# Altium PCB DB_Panel.PcbDoc
Units mm, origin at the board's own origin, x right, y up, seen from the top; angles counter-clockwise.
Board outline 241.45 x 205.99 mm, 4 copper layers (Top, Ground Plane, Power Plane, Bottom), stack 1.562 mm thick; 32 components, 0 nets, 4 pads, 0 vias.
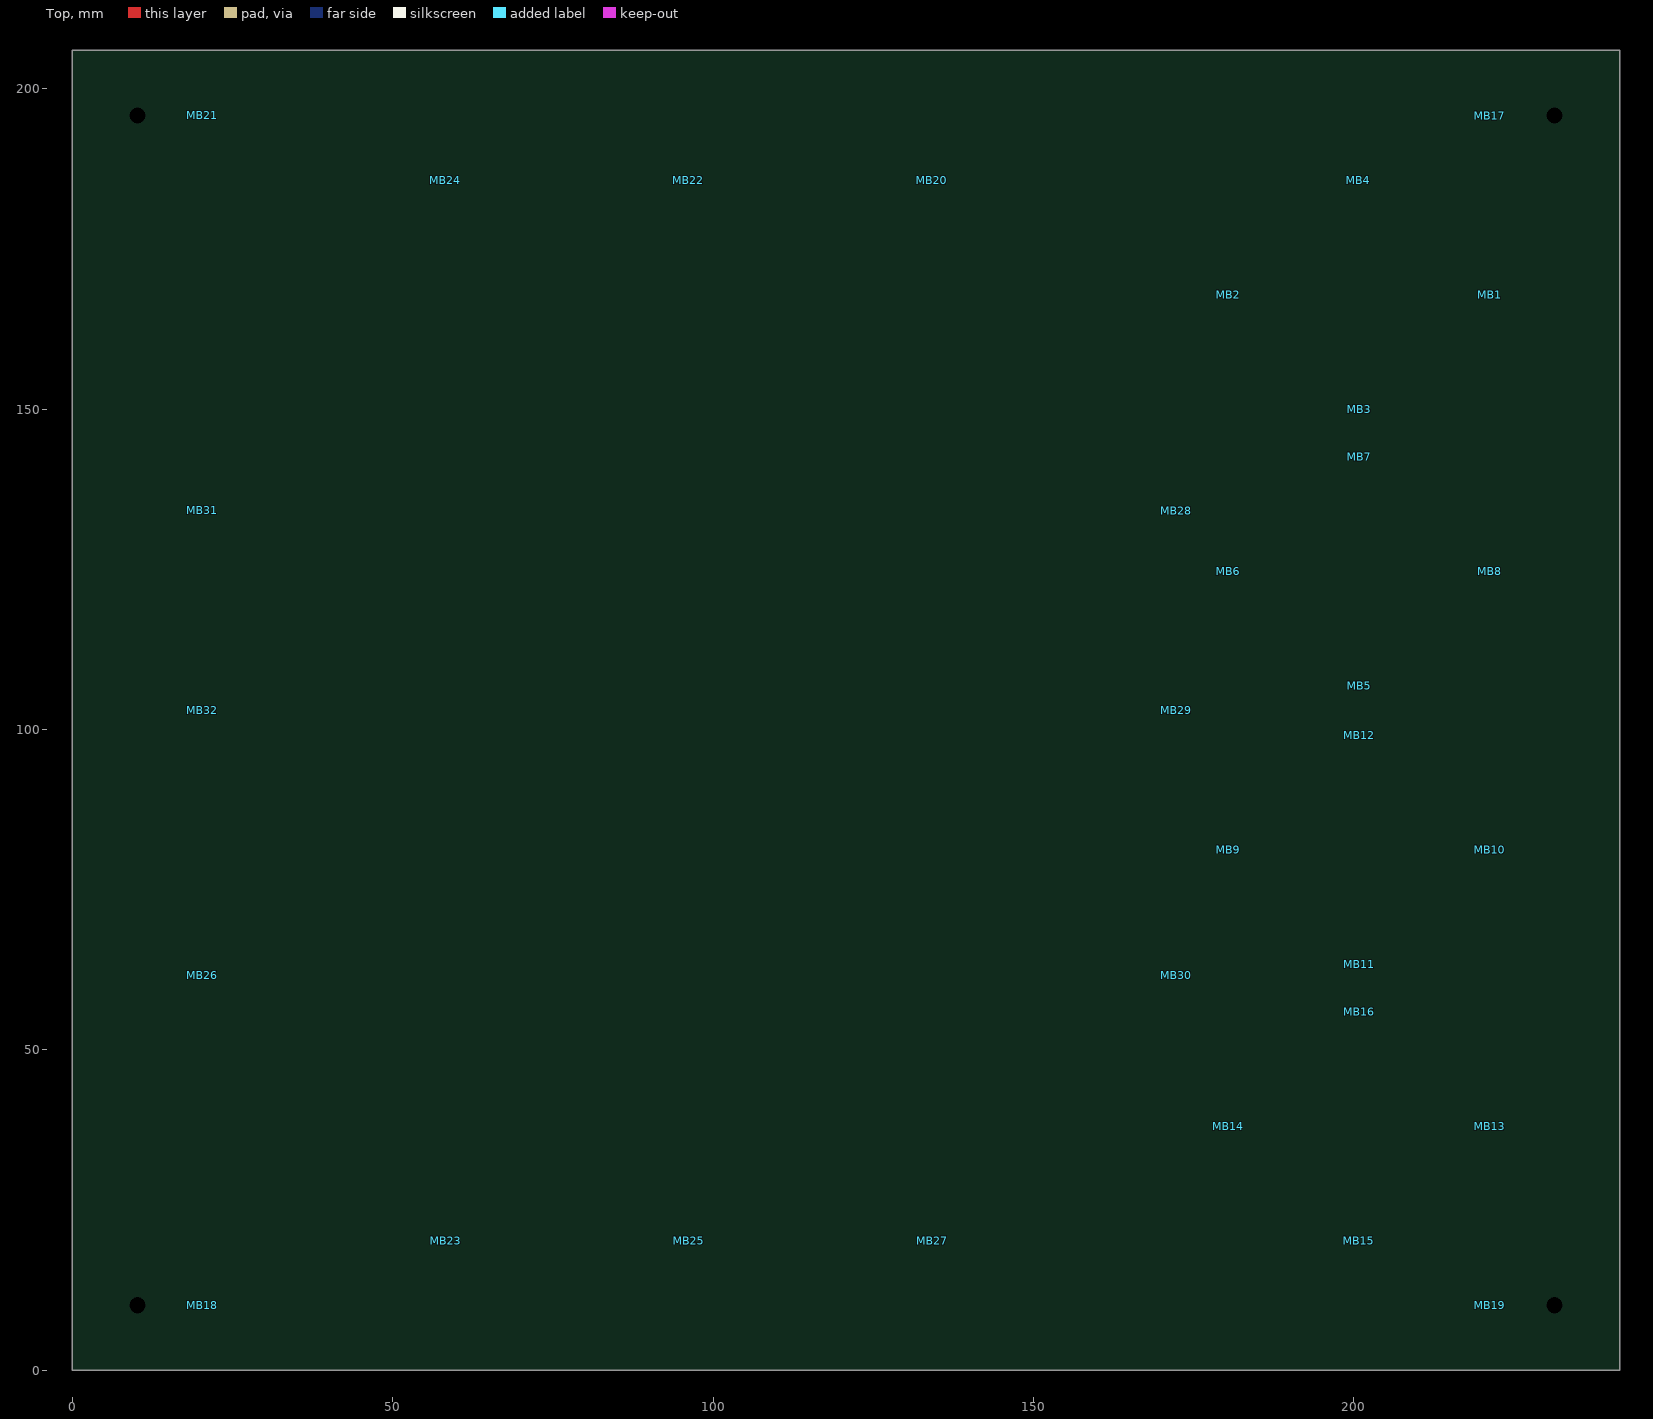
[diagram p0: Top view]
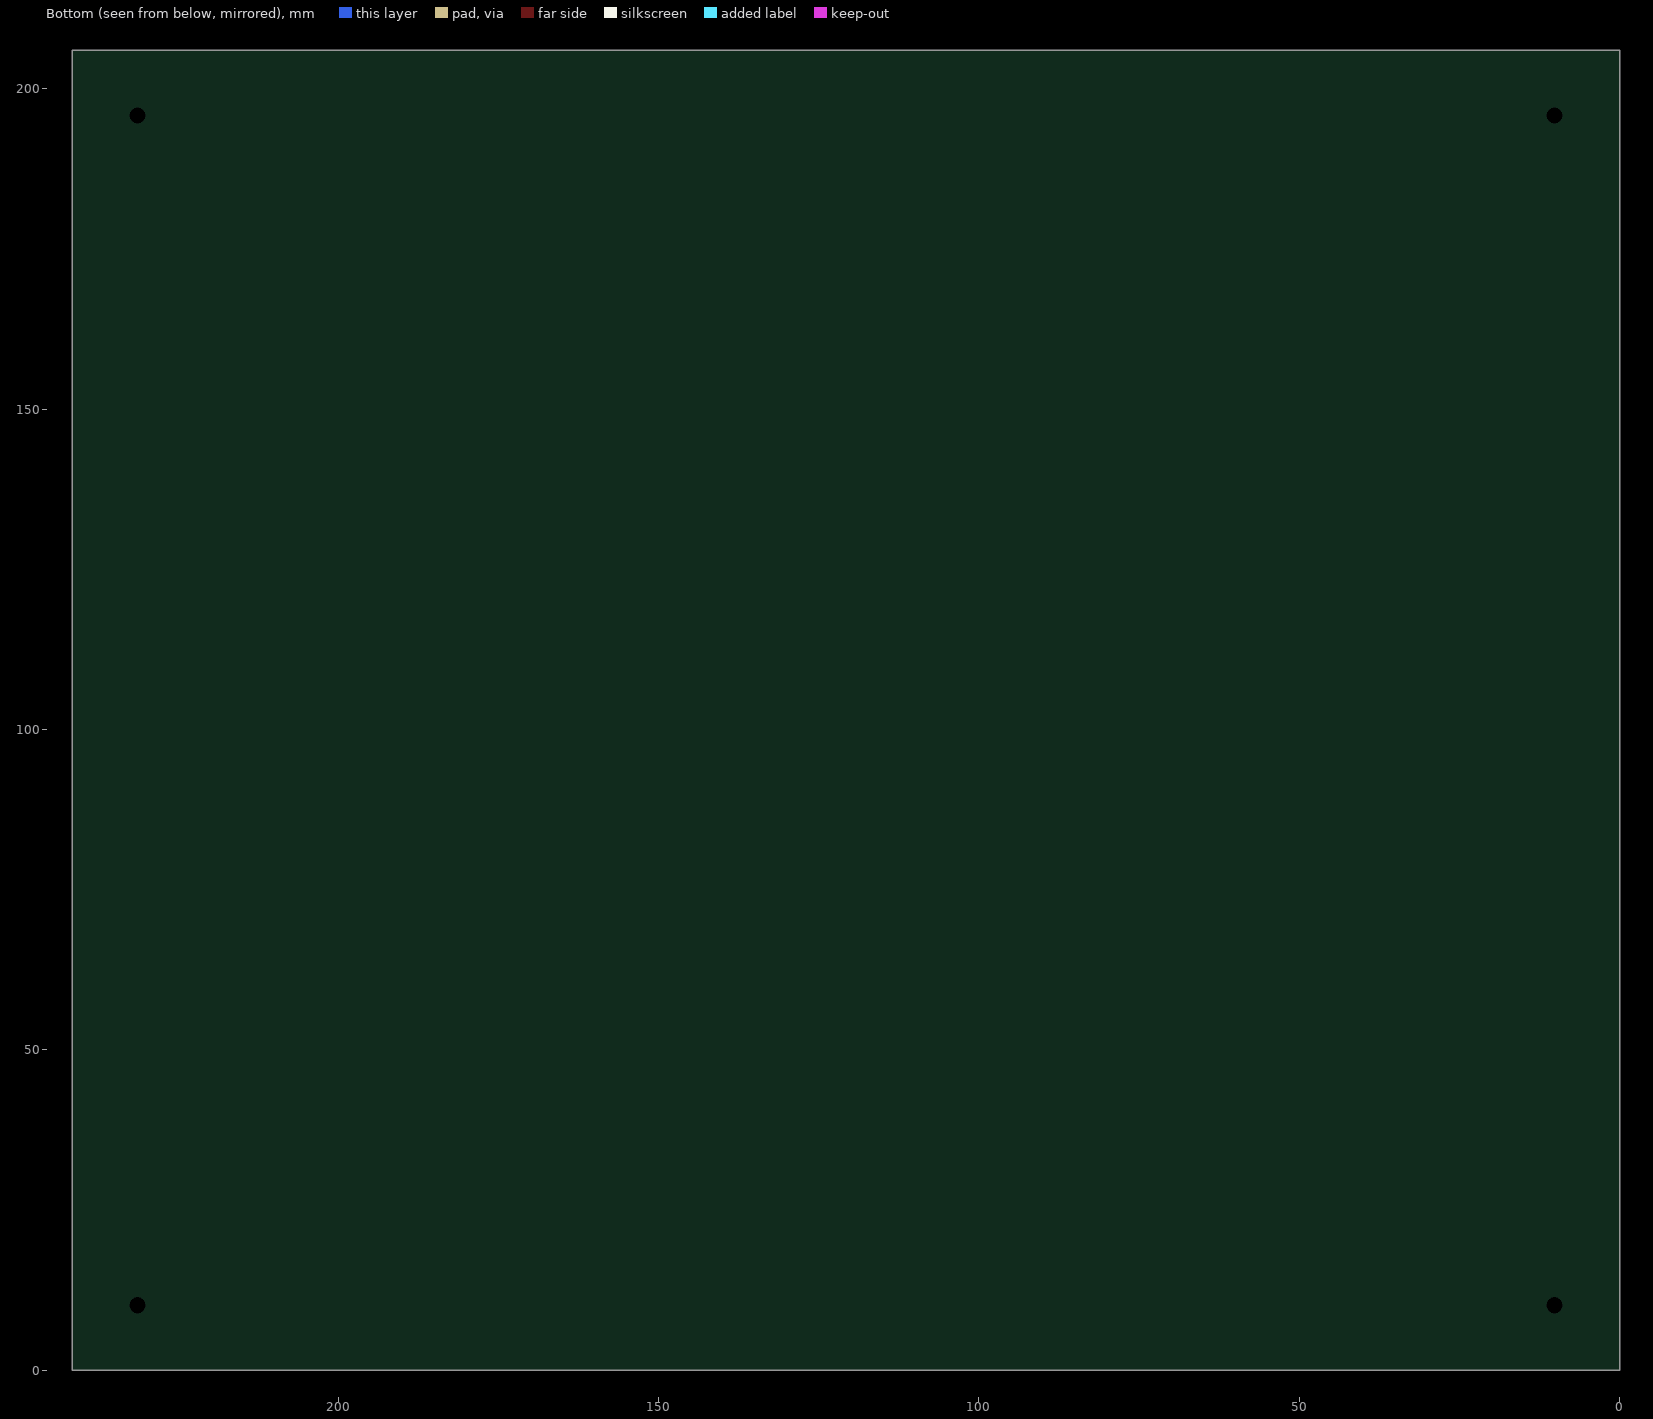
[diagram p1: Bottom view, seen from below]
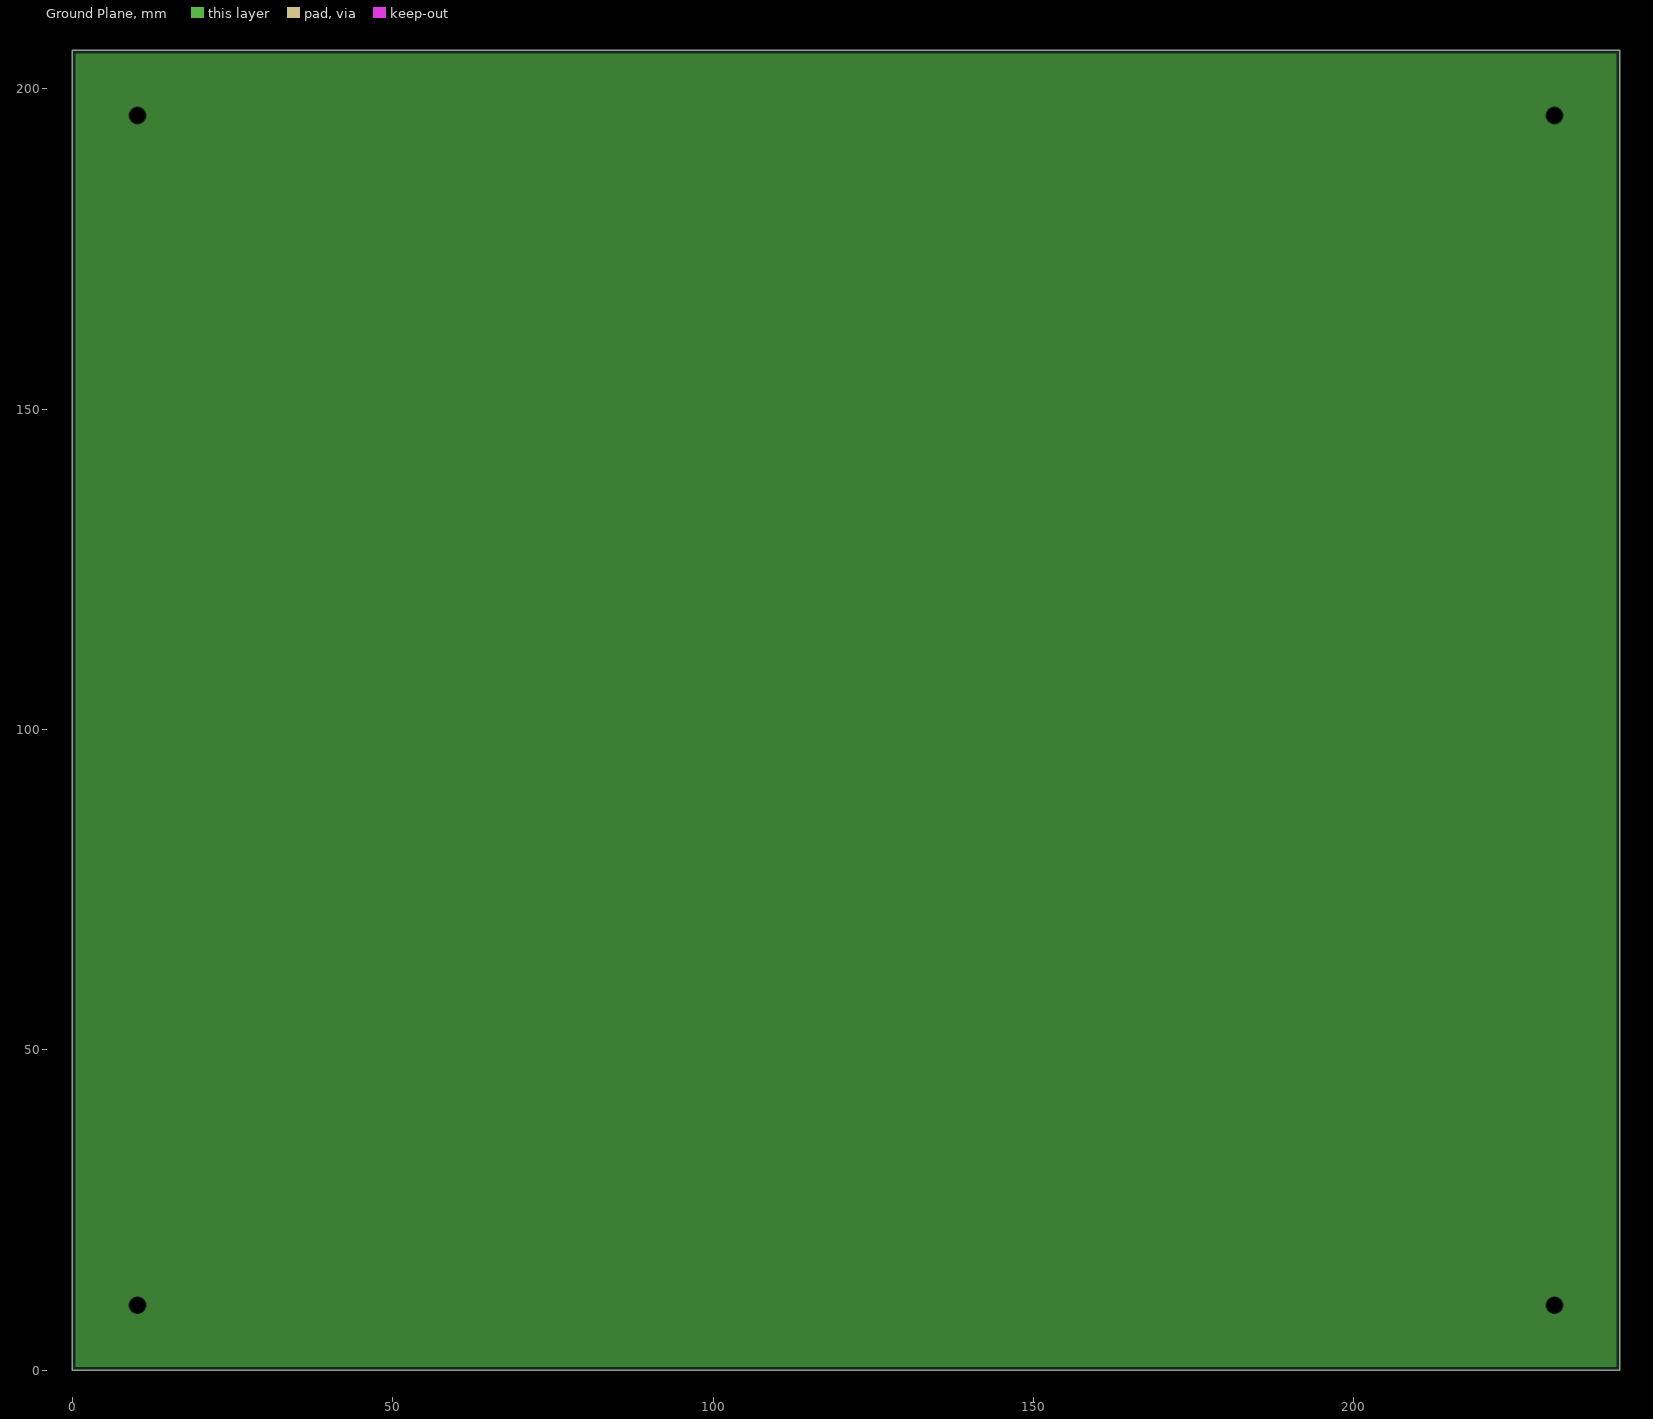
[diagram p2: Ground Plane, clearances drawn from the general rule]
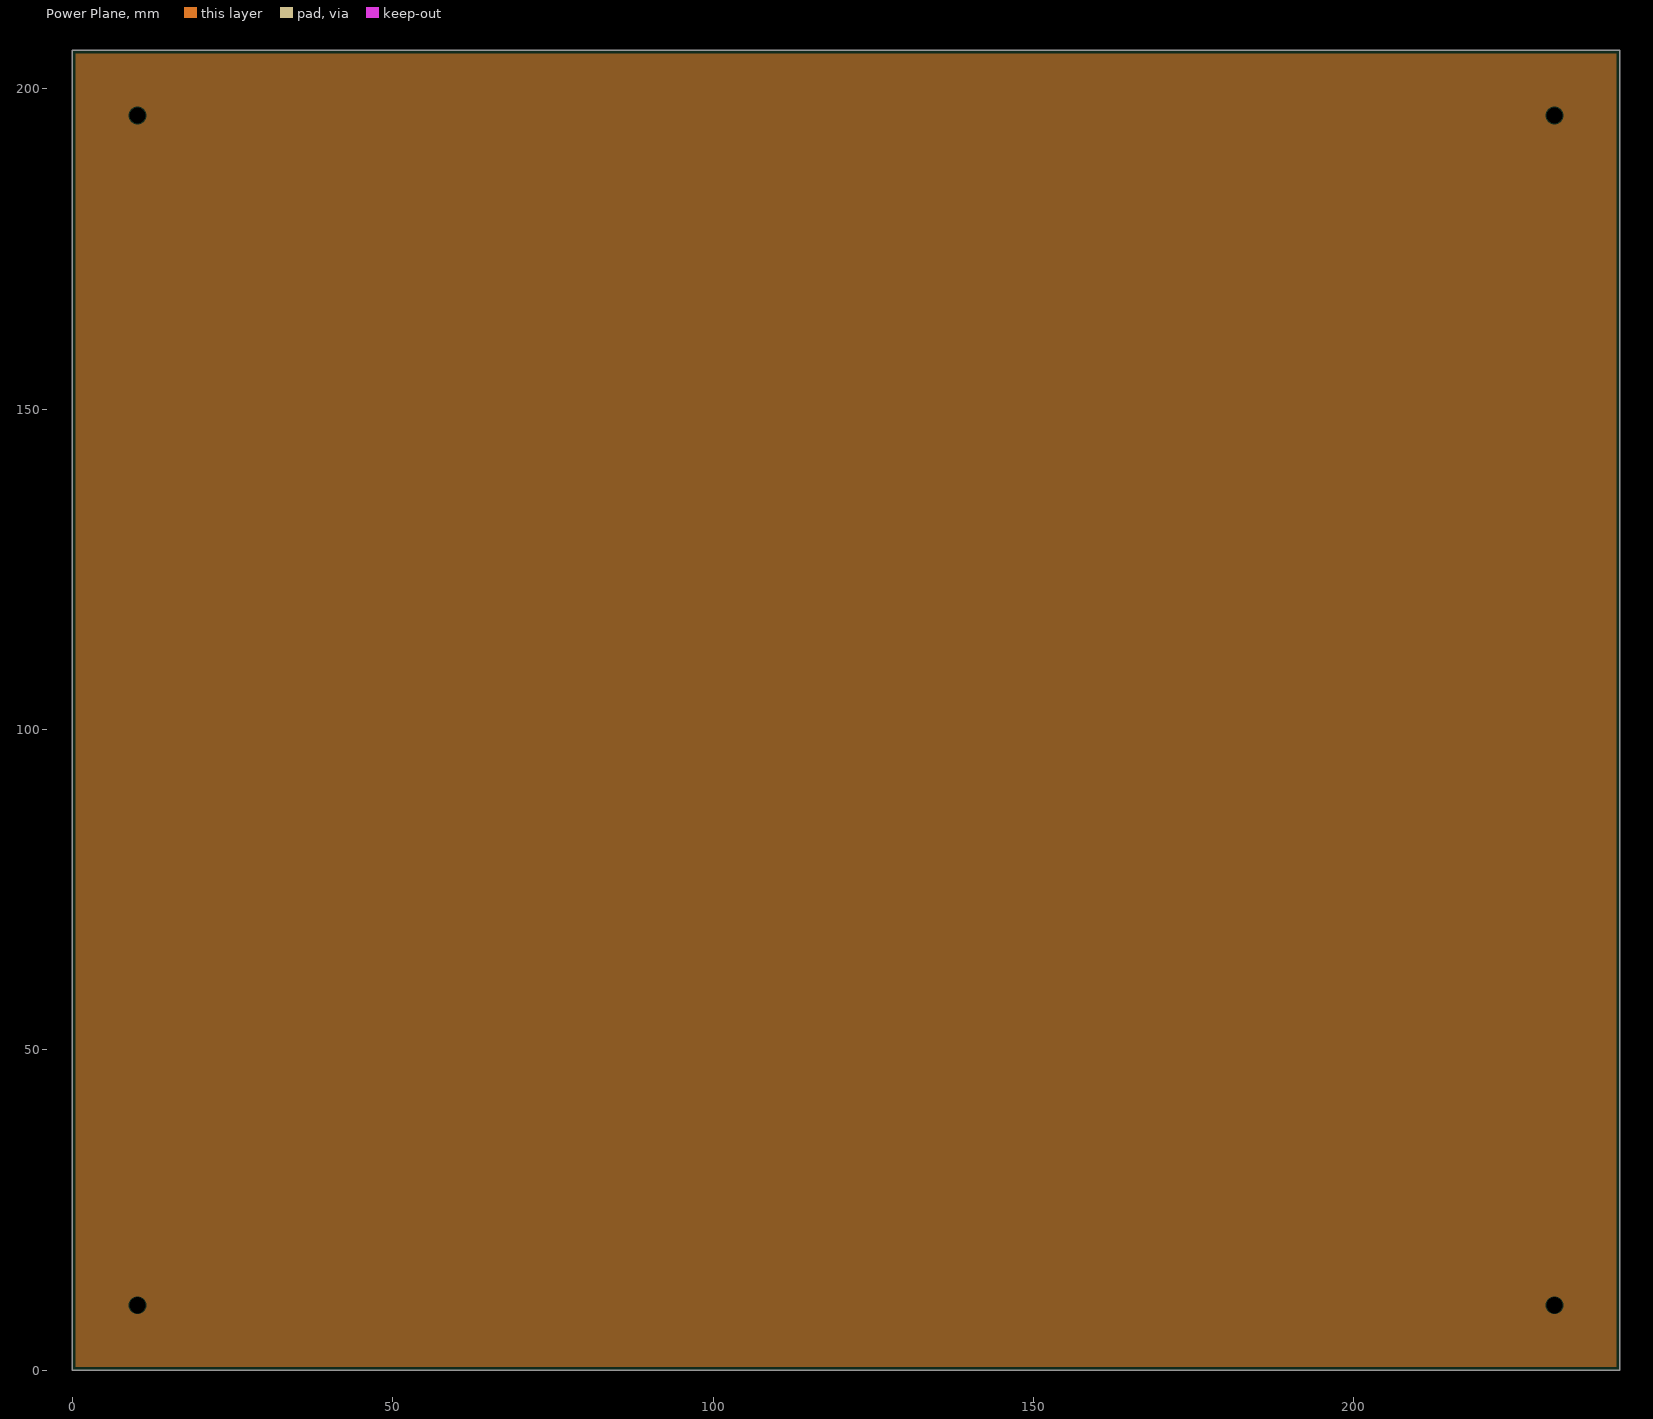
[diagram p3: Power Plane, clearances drawn from the general rule]

## Layer stack, top to bottom
Top Solder: solder mask 0.01, Solder Resist, Dk 3.5
Top: signal copper 0.035
Dielectric 1: prepreg 0.196, FR-4, Dk 4.74
Ground Plane: plane copper 0.035
Dielectric 3: core 1.03, Dk 4.6
Power Plane: plane copper 0.035
Dielectric 4: prepreg 0.196, Dk 4.74
Bottom: signal copper 0.035
Bottom Solder: solder mask 0.01, Solder Resist, Dk 3.5

## Board outline
0,0 241.452,0 241.452,205.994 0,205.994

## Design rules (kind name [scope] priority, off if disabled: settings)
Clearance [All] p1: gap=0.152 ignorepadtopadclearanceinfootprint=FALSE except(0: Arc-Hole Track-Hole SMDPad-Hole THPad-Hole Via-Hole Fill-Hole Poly-Hole Region-Hole Text-Hole)
ComponentClearance [All] p1: gap=0.102 collisioncheckmode=3 verticalgap=0.102 showdistances=FALSE
HoleSize [All] p1: absolutevalues=TRUE maxlimit=25.4 minlimit=0.102 maxpercent=80.000 minpercent=20.000
HoleToHoleClearance [All] p1: gap=0.254 allowstackedmicrovias=FALSE
MinimumSolderMaskSliver [All] p1: minsoldermaskwidth=0.102
PlaneClearance [All] p1: clearance=0.152
PlaneConnect [All] p1: pad.planeconnectstyle=Relief pad.reliefexpansion=0.508 pad.reliefentries=4 pad.reliefconductorwidth=0.254 pad.reliefairgap=0.254 via.planeconnectstyle=Direct via.reliefexpansion=0.508 via.reliefentries=4 via.reliefconductorwidth=0.254 via.reliefairgap=0.254
PolygonConnect [All] p1: thpad.connectstyle=Relief thpad.reliefconductorwidth=0.254 thpad.reliefentries=4 thpad.polygonreliefangle="90 Angle" thpad.airgapwidth=0.254 smdpad.connectstyle=Direct smdpad.reliefconductorwidth=0.254 smdpad.reliefentries=4 smdpad.polygonreliefangle="90 Angle" smdpad.airgapwidth=0.254 via.connectstyle=Direct via.reliefconductorwidth=0.254 via.reliefentries=4 via.polygonreliefangle="90 Angle" via.airgapwidth=0.254
RoutingVias [All] p1: holewidth=0.254 width=0.508 viastyle="Through Hole" minholewidth=0.254 minwidth=0.508 maxholewidth=0.254 maxwidth=0.508
SilkToSilkClearance [All] p1: silktosilkclearance=0.102
SilkToSolderMaskClearance [IsPad] p1: minsilkscreentomaskgap=0.051 clearancetoexposedcopper=FALSE
SolderMaskExpansion [All] p1: expansion=0.051 istentingtop=FALSE
Width [All] p1: maxlimit=25.4 minlimit=0.102 preferedwidth=0.152
22 further rules are at their usual default settings.

## Components (designator, comment, footprint, x,y, rotation, side; value= is the part's Value field where it differs from the comment)
MB1 "Part Number" MSBITE_1.6mm 221.221,167.883 r270 top
MB2 "Part Number" MSBITE_1.6mm 180.391,167.894 r90 top
MB3 "Part Number" MSBITE_1.6mm 200.823,150.025 r180 top
MB4 "Part Number" MSBITE_1.6mm 200.685,185.75 r0 top
MB5 "Part Number" MSBITE_1.6mm 200.823,106.845 r180 top
MB6 "Part Number" MSBITE_1.6mm 180.391,124.714 r90 top
MB7 "Part Number" MSBITE_1.6mm 200.812,142.57 r0 top
MB8 "Part Number" MSBITE_1.6mm 221.221,124.703 r270 top
MB9 "Part Number" MSBITE_1.6mm 180.391,81.28 r90 top
MB10 "Part Number" MSBITE_1.6mm 221.221,81.269 r270 top
MB11 "Part Number" MSBITE_1.6mm 200.823,63.411 r180 top
MB12 "Part Number" MSBITE_1.6mm 200.812,99.136 r0 top
MB13 "Part Number" MSBITE_1.6mm 221.221,38.089 r270 top
MB14 "Part Number" MSBITE_1.6mm 180.391,38.1 r90 top
MB15 "Part Number" MSBITE_1.6mm 200.762,20.218 r180 top
MB16 "Part Number" MSBITE_1.6mm 200.812,55.956 r0 top
MB17 "Part Number" MSBITE_1.6mm 221.221,195.823 r270 top
MB18 "Part Number" MSBITE_1.6mm 20.244,10.185 r90 top
MB19 "Part Number" MSBITE_1.6mm 221.221,10.149 r270 top
MB20 "Part Number" MSBITE_1.6mm 134.112,185.75 r0 top
MB21 "Part Number" MSBITE_1.6mm 20.244,195.859 r90 top
MB22 "Part Number" MSBITE_1.6mm 96.139,185.75 r0 top
MB23 "Part Number" MSBITE_1.6mm 58.228,20.256 r180 top
MB24 "Part Number" MSBITE_1.6mm 58.166,185.75 r0 top
MB25 "Part Number" MSBITE_1.6mm 96.201,20.256 r180 top
MB26 "Part Number" MSBITE_1.6mm 20.244,61.671 r90 top
MB27 "Part Number" MSBITE_1.6mm 134.174,20.256 r180 top
MB28 "Part Number" MSBITE_1.6mm 172.301,134.177 r270 top
MB29 "Part Number" MSBITE_1.6mm 172.301,102.986 r270 top
MB30 "Part Number" MSBITE_1.6mm 172.301,61.635 r270 top
MB31 "Part Number" MSBITE_1.6mm 20.244,134.214 r90 top
MB32 "Part Number" MSBITE_1.6mm 20.244,103.022 r90 top

## Footprints (in the part's own frame and the unit in brackets; to place one, negate y for a bottom-side part, rotate by r counter-clockwise, add the part's x,y. Pads: shape width x height; smd on the part's side, far side on the other; paste and mask are expansions set on the pad)
MSBITE_1.6mm [mm] "Mousebite - 1.6 mm spacing"

## Part data
MB1 MB2 MB3 MB4 MB5 MB6 MB7 MB8 MB9 MB10 MB11 MB12 MB13 MB14 MB15 MB16 MB17 MB18 MB19 MB20 MB21 MB22 MB23 MB24 MB25 MB26 MB27 MB28 MB29 MB30 MB31 MB32: library part Mousebite, "Mousebite, 0.5 mm hole 5x, 0.3 mm spacing, 1.5 mm tool route", GRAMS Lib Spec=2.7

## Free pads (board coordinates)
  round 0 hole 2.5 unplated: MH(10.16,10.16) MH(10.16,195.834) MH(231.292,10.16) MH(231.292,195.834)

## Nets (pads, with @x,y where several pads share a name; then routed paths per layer and width w, separated by ;. In a path a pad name is that pad's centre, name@x,y a point inside that pad or via, vN(x,y) a via of type N, cw(c..) or ccw(c..) an arc to the next point about the centre after c; other vN are vias at no path point)

## Polygon pours and split planes (outlines as drawn)
no net on Ground Plane (split plane): 240.942,0.51 0.51,0.51 0.51,205.484 240.942,205.484
no net on Power Plane (split plane): 240.942,0.51 0.51,0.51 0.51,205.484 240.942,205.484

## Silkscreen, mask and mechanical layers (free items; w line width, h text height)
Panel Outline:
  the board outline again, w0.254
Route Tool Path:
  lines w1.6: 19.444,0.341 19.444,5.585 ; 19.444,13.285 19.444,58.571 ; 19.444,64.771 19.444,99.922 ; 19.444,106.122 19.444,131.114 ; 19.444,137.314 19.444,192.759 ; 19.444,200.459 19.444,205.704 ; 19.533,186.55 55.066,186.55 ; 19.558,19.456 55.128,19.456 ; 61.266,186.55 93.039,186.55 ; 61.342,19.422 93.115,19.422 ; 99.239,186.55 131.012,186.55 ; 99.315,19.422 131.088,19.422 ; 137.212,186.55 197.585,186.55 ; 137.288,19.422 197.662,19.422 ; 173.101,19.507 173.101,58.535 ; 173.101,64.735 173.101,99.886 ; 173.101,106.086 173.101,129.577 ; 173.101,137.277 173.101,186.501 ; 179.337,143.37 197.712,143.37 179.591,143.37 ; 179.591,19.422 179.591,35 ; 179.591,41.2 179.591,78.18 ; 179.591,56.756 197.712,56.756 ; 179.591,62.611 197.723,62.611 ; 179.591,99.936 197.712,99.936 ; 179.591,100.339 179.591,114.827 ; 179.591,106.045 197.723,106.045 ; 179.591,127.814 179.591,143.65 ; 179.591,143.773 179.591,158.261 ; 179.591,148.946 179.591,164.794 ; 179.591,149.225 197.723,149.225 ; 179.591,170.994 179.591,186.55 ; 179.602,62.201 179.602,76.689 ; 179.602,84.389 179.602,121.369 ; 203.785,186.55 222.021,186.55 ; 203.862,19.418 222.021,19.418 ; 203.912,56.756 222.021,56.756 ; 203.912,99.936 222.021,99.936 ; 203.912,143.37 222.021,143.37 ; 203.923,62.611 222.021,62.611 ; 203.923,106.045 222.021,106.045 ; 203.923,149.225 222.021,149.225 ; 222.021,0.305 222.021,5.549 ; 222.021,13.249 222.021,33.489 ; 222.021,41.189 222.021,76.669 ; 222.021,84.369 222.021,120.103 ; 222.021,127.803 222.021,163.283 ; 222.021,170.983 222.021,191.223 ; 222.021,200.423 222.021,205.668
Manufacturing Notes:
  lines w0.254: 251.444,154.939 311.167,154.939 ; 309.667,193.039 311.167,193.039 ; 311.134,151.129 311.134,193.039 311.134,196.849 ; 311.167,151.129 251.444,151.129 251.444,193.039 ; 311.167,158.749 251.444,158.749 251.444,162.559 311.167,162.559 ; 311.167,166.369 251.444,166.369 251.444,170.179 311.167,170.179 ; 311.167,173.989 251.444,173.989 251.444,177.799 311.167,177.799 ; 311.167,181.609 251.444,181.609 251.444,185.419 311.167,185.419 ; 311.167,189.229 251.444,189.229 251.444,193.039 ; 311.167,196.849 251.444,196.849 251.444,193.039 ; 251.444,193.039 265.414,193.039 ; 251.444,193.039 311.167,193.039 ; 265.414,193.039 265.414,196.849 278.114,196.849 278.114,193.039 ; 265.414,193.039 265.414,151.129 278.114,151.129 278.114,193.039 ; 278.114,193.039 288.274,193.039 ; 278.114,193.039 288.274,193.039 ; 288.274,193.039 288.274,196.849 302.244,196.849 302.244,193.039 ; 288.274,193.039 288.274,151.129 302.244,151.129 302.244,193.039 ; 302.244,193.039 311.167,193.039 ; 302.244,193.039 311.167,193.039
  text "Type" at 255.508,194.595 h1.52
  text "Material" at 268.97,194.595 h1.52
  text "Weight" at 281.162,194.595 h1.52
  text "Dk" at 306.054,194.595 h1.52
  text "Thickness *" at 291.83,194.563 h1.52
  text "Top Overlay" at 253.139,190.498 h1.52
  text "0.01 mm" at 291.846,186.766 h1.52
  text "3.5" at 305.46,186.715 h1.52
  text "Top Solder" at 253.139,186.673 h1.52
  text "0.0175 mm" at 291.414,183.998 h1.52
  text "0.5 oz" at 281.457,183.312 h1.52
  text "Top Layer" at 253.139,182.879 h1.52
  text "(Plating to 1 oz)" at 290.474,182.194 h1.52
  text "0.196 mm" at 292.151,179.247 h1.52
  text "4.74" at 305.41,179.231 h1.52
  text "7628 RC 46%" at 268.427,179.197 h1.52
  text "Dielectric 1" at 253.139,178.798 h1.52
  text "Second Layer" at 253.416,175.478 h1.52
  text "1 oz" at 281.305,175.311 h1.52
  text "0.035 mm" at 291.567,175.183 h1.52
  text "Core" at 253.594,171.704 h1.52
  text "1.03 mm" at 291.77,171.526 h1.52
  text "4.6" at 305.587,171.45 h1.52
  text "Core" at 268.808,171.104 h1.52
  text "1 oz" at 281.254,167.716 h1.52
  text "0.035 mm" at 291.998,167.665 h1.52
  text "Third Layer" at 253.139,167.638 h1.52
  text "7628 RC 46%" at 267.284,164.033 h1.52
  text "4.74" at 304.791,163.927 h1.52
  text "0.196 mm" at 291.617,163.855 h1.52
  text "Dielectric 2" at 253.139,163.558 h1.52
  text "0.0175 mm" at 290.813,161.066 h1.52
  text "0.5 oz" at 281.661,160.123 h1.52
  text "Fourth Layer" at 253.139,160.018 h1.52
  text "(Plating to 1 oz)" at 289.873,159.262 h1.52
  text "3.5" at 305.537,156.514 h1.52
  text "Bottom Solder" at 253.139,156.225 h1.52
  text "0.01 mm" at 291.973,156.083 h1.52
  text "Bottom Overlay" at 253.139,152.685 h1.52
  text "Standard 4 layer stackup:" at 251.968,148.717 h1.52
  text "Thickness 1.6 mm" at 253.39,146.991 h1.52
  text "Finished Outer Copper: 1 oz" at 253.594,145.491 h1.52
  text "Inner Copper: 1 oz" at 253.619,144.043 h1.52
  text "Inner layer residual copper ratio: 50%" at 253.441,142.409 h1.52

## Panel: embedded boards
"..\Electrode_Breakout\Electrode_Breakout.PcbDoc" at 180.492,20.32, 1 rows x 1 columns, spacing 63.5 x 38.1, rotation 0
"..\Electrode_Breakout\Electrode_Breakout.PcbDoc" at 180.492,63.5, 1 rows x 1 columns, spacing 63.5 x 38.1, rotation 0
"..\Electrode_Breakout\Electrode_Breakout.PcbDoc" at 180.492,106.934, 1 rows x 1 columns, spacing 63.5 x 38.1, rotation 0
"..\Electrode_Breakout\Electrode_Breakout.PcbDoc" at 180.492,150.114, 1 rows x 1 columns, spacing 63.5 x 38.1, rotation 0
"..\FPGA_DB\FPGA_DB.PcbDoc" at 20.32,20.32, 1 rows x 1 columns, spacing 63.5 x 38.1, rotation 0